# EAGLE board USB Dash Daughter Board (EAGLE 8.4.1)
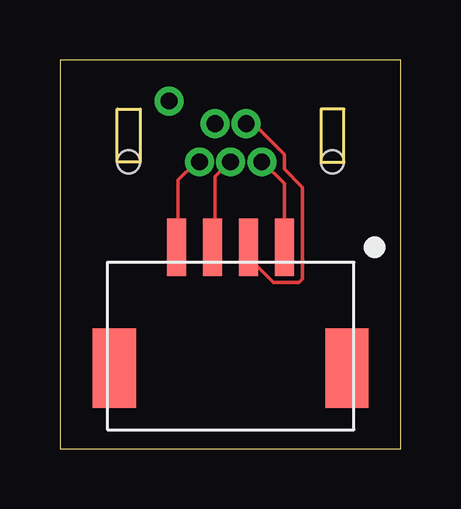
[diagram p0: board, top side]

Size 14.22 x 16.22 mm. Coordinates in mm from the lower left corner, seen from the top.
Outline: 0,0 14.22,0 14.22,16.22 0,16.22 0,0
Copper layers (1*16): Top 0.035mm / dielectric 1.5mm / Bottom 0.035mm
Design rules "default": minimum track width 6mil, minimum drill 0.35mm, track to track 6mil, track to pad 6mil, pad to pad 6mil, via to via 6mil, smd to smd 6mil, copper to edge 40mil, drill to drill 6mil, minimum pad ring 10mil, minimum via ring 8mil, stop-mask expansion 4mil, vias tented up to drill 0mil, thermal gap 10mil

## Footprints (pad centres in the part's own frame; a part is rotated, then mirrored left to right if it is on the bottom)
MOLEX-CLIKMATE-4-VERTICAL-HEADER = smd 0.8 x 2.4: 1 2.25,4.064; 2 0.75,4.064; 3 -0.75,4.064; 4 -2.25,4.064 | smd 1.8 x 3.3: M1 4.85,-0.986; M2 -4.85,-0.986
USB-AB-MICRO-THROUGH_HOLE = drill 0.7: P$1 1.3,0; P$2 0.65,-1.6; P$3 0,0; P$4 -0.65,-1.6; P$5 -1.3,0; P$6 2.57,-2.54 | hole 0.95: -4.25,0; 4.25,0

## Placement (x,y rotation side)
J1  5025840470  [MOLEX-CLIKMATE-4-VERTICAL-HEADER]  7.12,4.35 0 top
U$1  USB-AB-MICRO-THROUGH_HOLE  [USB-AB-MICRO-THROUGH_HOLE]  7.12,11.97 180 top

## Library data of the parts
J1 U$1 = FormE

## Nets
N$1: J1.1 U$1.P$5
N$2: J1.2 U$1.P$4
N$3: J1.3 U$1.P$3
N$4: J1.4 U$1.P$1

## Tracks (layer width: path | path; a pad name or v marks a point on that pad's centre or on a via)
N$1
  Top 0.152: J1.1 9.35,8.47 9.35,11.06 8.44,11.97 U$1.P$5
N$2
  Top 0.152: J1.2 7.98,8.31 7.98,7.86 8.9,6.94 9.96,6.94 10.12,7.09 10.12,10.9 9.35,11.66 9.35,12.28 8.14,13.49 7.83,13.49 U$1.P$4
N$3
  Top 0.152: J1.3 6.46,8.47 6.46,11.36 7.07,11.97 U$1.P$3
N$4
  Top 0.152: J1.4 4.94,8.47 4.94,11.21 5.7,11.97 U$1.P$1